# EAGLE board 190209360_Lab4(1) (EAGLE 7.6.0)

Size 56.82 x 53.33 mm. Coordinates in mm from the lower left corner, seen from the top.
Outline: 0,0 56.82,0 56.82,53.33 0,53.33 0,0
Copper layers (1*16): Top 0.035mm / dielectric 1.5mm / Bottom 0.035mm
Design rules "default": minimum track width 10mil, minimum drill 24mil, track to track 8mil, track to pad 8mil, pad to pad 8mil, via to via 8mil, smd to smd 8mil, copper to edge 40mil, drill to drill 8mil, minimum pad ring 10mil, minimum via ring 8mil, stop-mask expansion 4mil, vias tented up to drill 0mil, thermal gap 10mil

## Footprints (pad centres in the part's own frame; a part is rotated, then mirrored left to right if it is on the bottom)
CR2032H = drill 1.118 pad 2.54 octagon: + 5.08,10.795; +@1 -5.08,10.795; - 0,-6.985
LED5MM = drill 0.813 octagon: A -1.27,0; K 1.27,0
0207/10 = drill 0.813 octagon: 1 -5.08,0; 2 5.08,0
DIP04YL = drill 0.813 long: 1 -3.81,-3.81; 2 -1.27,-3.81; 3 1.27,-3.81; 4 3.81,-3.81; 5 3.81,3.81; 6 1.27,3.81; 7 -1.27,3.81; 8 -3.81,3.81
DIL14 = drill 0.813 long: 1 -7.62,-3.81; 2 -5.08,-3.81; 3 -2.54,-3.81; 4 0,-3.81; 5 2.54,-3.81; 6 5.08,-3.81; 7 7.62,-3.81; 8 7.62,3.81; 9 5.08,3.81; 10 2.54,3.81; 11 0,3.81; 12 -2.54,3.81; 13 -5.08,3.81; 14 -7.62,3.81

## Placement (x,y rotation side)
BAT1  [CR2032H]  5,48.18 0 top
D1  [LED5MM]  5,10.08 0 top
D2  [LED5MM]  5,124.38 0 top  (outside the outline)
R1  51‎Ω  [0207/10]  5,22.78 0 top
R2  1k‎Ω  [0207/10]  5,73.58 0 top  (outside the outline)
R3  1k‎Ω  [0207/10]  5,86.28 0 top  (outside the outline)
R4  1k‎Ω  [0207/10]  5,98.98 0 top  (outside the outline)
R5  1k‎Ω  [0207/10]  5,111.68 0 top  (outside the outline)
R6  51‎Ω  [0207/10]  5,137.08 0 top  (outside the outline)
SW1  [DIP04YL]  5,60.88 0 top  (outside the outline)
U1  [DIL14]  5,35.48 0 top

## Library data of the parts
BAT1 D1 D2 R1-R6 SW1 U1 = AUTODESK_CIRCUITS_BREADBOARD

## Nets
N$1: U1.3
N$2: U1.5
N$3: U1.2
N$4: U1.6
N$5: U1.1
N$6: U1.4
N$7: D1.K R1.2
N$8: D1.A U1.11
N$9: R4.1 SW1.6 U1.10
N$10: BAT1.+ BAT1.+@1 R2.2 R3.2 R4.2 R5.2 U1.14
N$11: D2.K R6.2
N$12: R2.1 SW1.8 U1.13
N$13: R3.1 SW1.7 U1.12
N$14: D2.A U1.8
N$15: BAT1.- R1.1 R6.1 SW1.1 SW1.2 SW1.3 SW1.4 U1.7
N$16: R5.1 SW1.5 U1.9

## Tracks (layer width: path | path; a pad name or v marks a point on that pad's centre or on a via)
N$7  (1 unrouted)
N$8  (1 unrouted)
N$9  (2 unrouted)
N$10  (6 unrouted)
N$11  (1 unrouted)
N$12  (2 unrouted)
N$13  (2 unrouted)
N$14  (1 unrouted)
N$15  (7 unrouted)
N$16  (2 unrouted)